# Altium PCB Review_2510_RegulationChauffage_Motherboard.PcbDoc (part 1 of 2)
Units mm, origin at the board's own origin, x right, y up, seen from the top; angles counter-clockwise.
Board outline 110.26 x 190.25 mm, 2 copper layers (Top Layer, Bottom Layer), stack 1.586 mm thick; 113 components, 95 nets, 627 pads, 337 vias.
Unrouted connection lines stored in the file: 154.
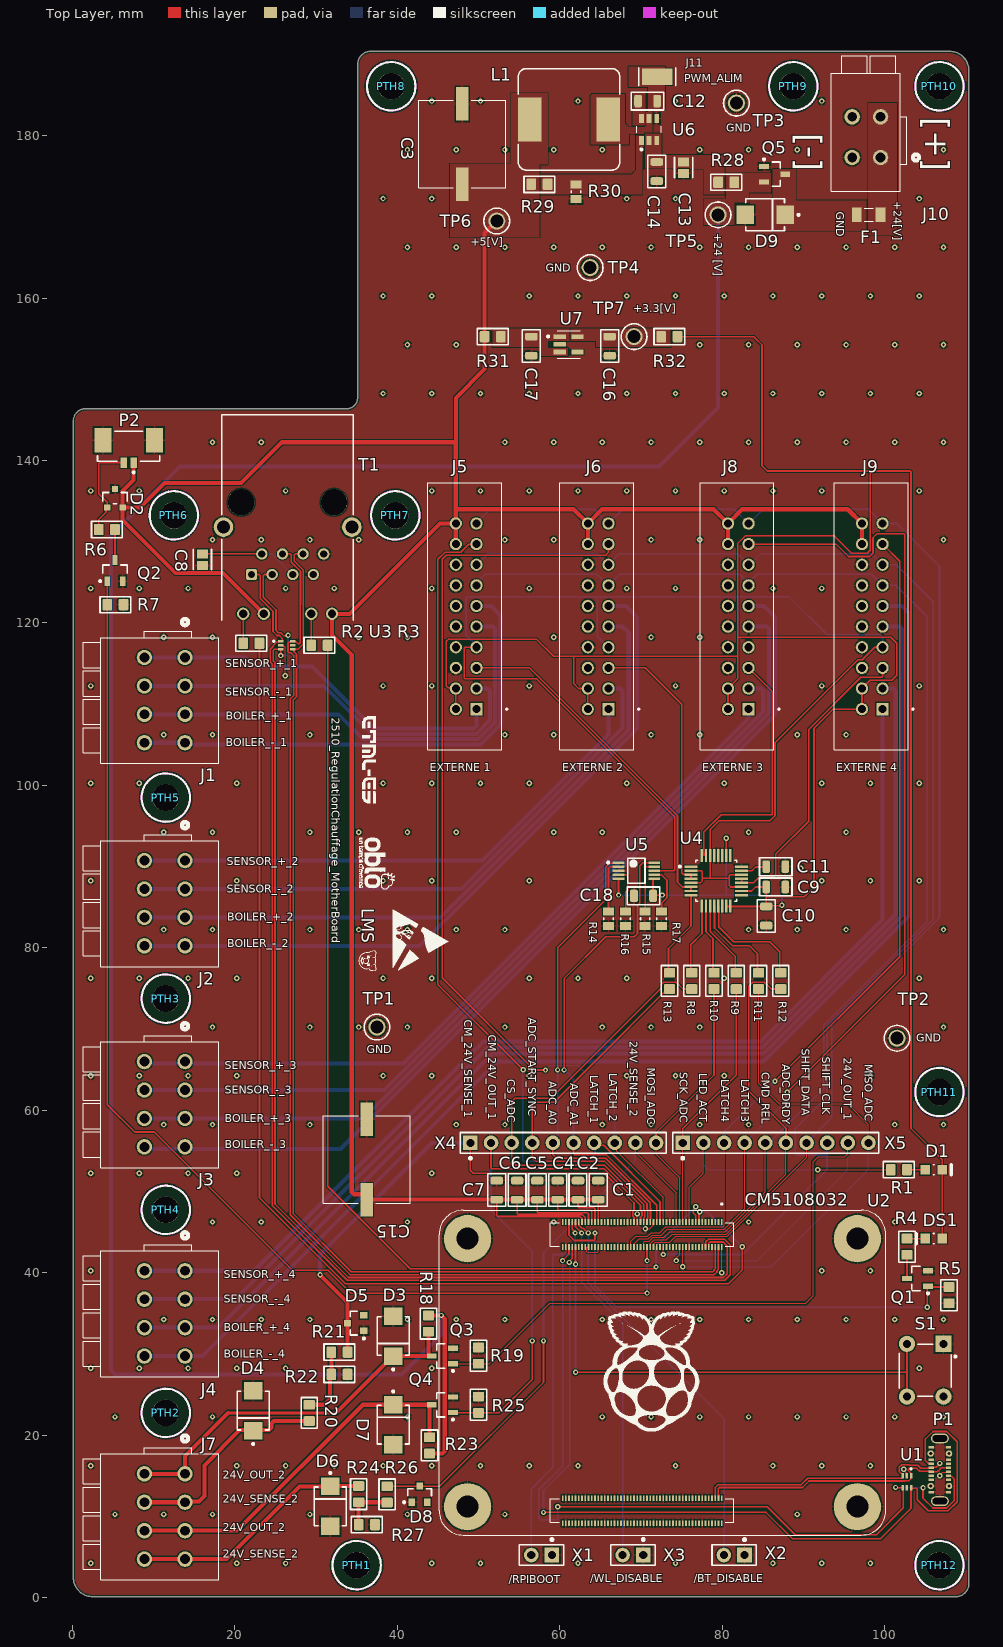
[diagram p0: Top Layer view]
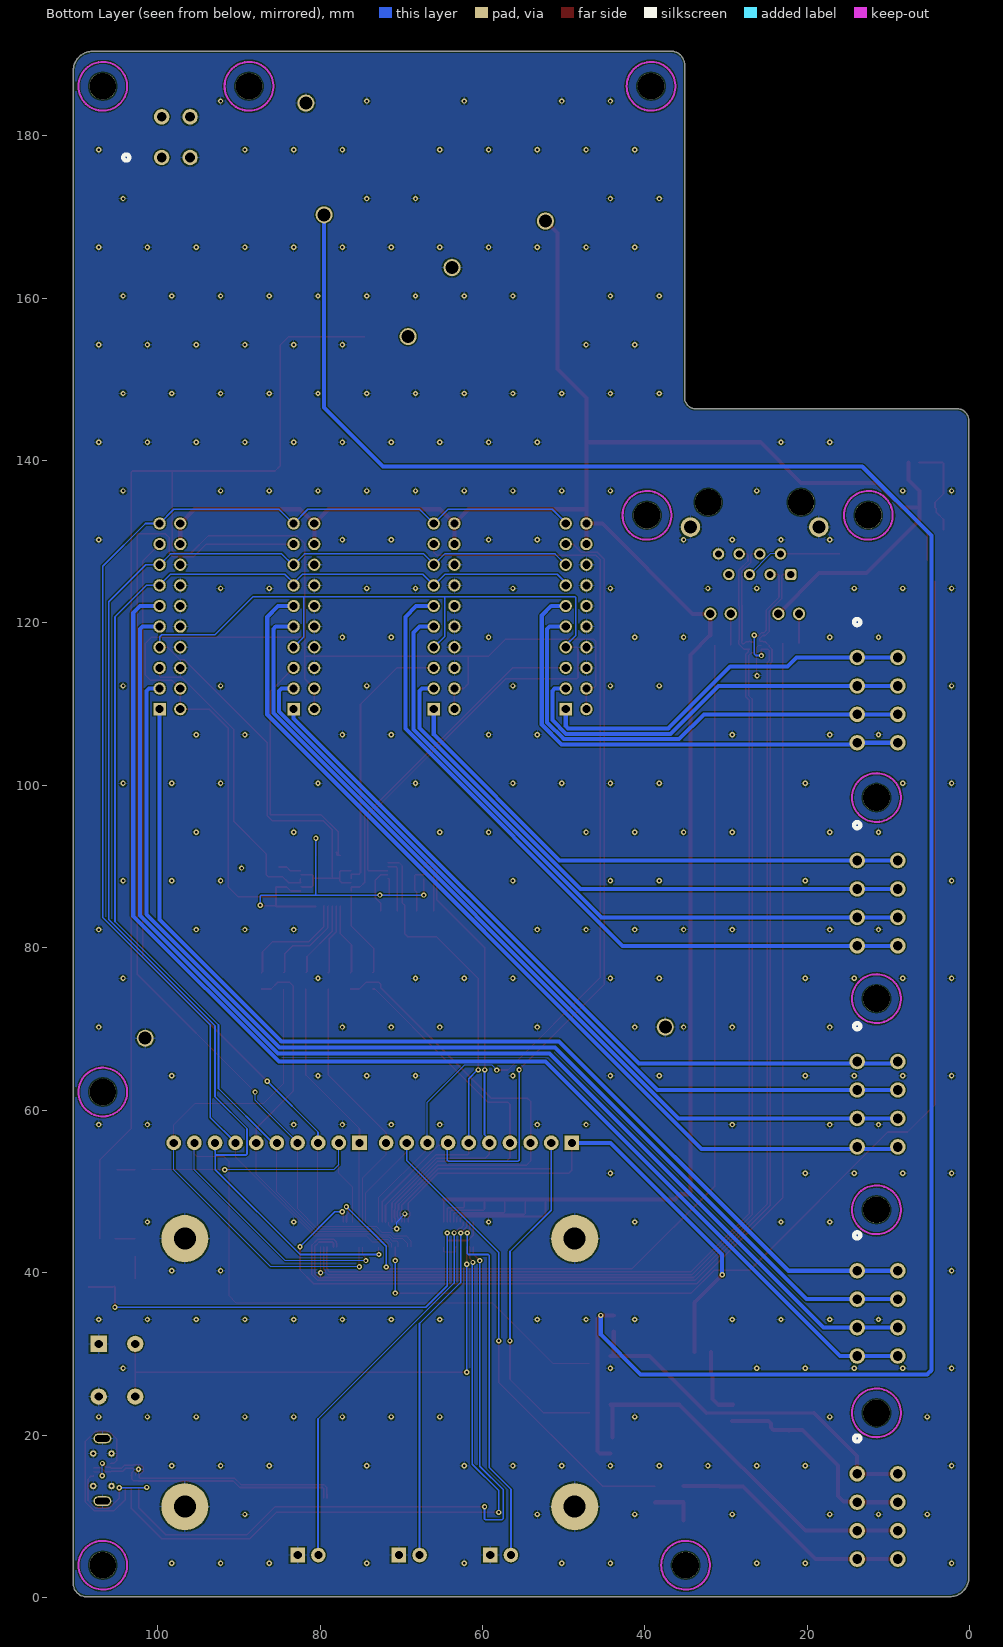
[diagram p1: Bottom Layer view, seen from below]

## Layer stack, top to bottom
Top Solder: solder mask 0.0102, Solder Resist, Dk 3.5
Top Layer: signal copper 0.018
Dielectric1: core 1.55, FR-4, Dk 4.8
Bottom Layer: signal copper 0.018
Bottom Solder: solder mask 0.0102, Solder Resist, Dk 3.5

## Board outline
0.123,2.5 0.123,144.744 cw(c1.625,144.875) 0.123,145.012 cw(c1.625,144.875) 1.488,146.377 1.5,146.377 33.75,146.377 ccw(c33.75,147.75) 35.123,147.75 35.123,188.75 cw(c36.75,188.75) 36.75,190.377 108,190.377 cw(c108,188) 110.377,188 110.377,1.75 cw(c108.75,1.75) 108.75,0.123 2.5,0.123 cw(c2.5,2.5)

## Design rules (kind name [scope] priority, off if disabled: settings)
BoardOutlineClearance [All] p1: gap=0.25 ignorepadtopadclearanceinfootprint=FALSE except(0: Arc-SplitContinuation Track-SplitContinuation SMDPad-SplitContinuation THPad-SplitContinuation Via-SplitContinuation Fill-SplitContinuation Poly-SplitContinuation Region-SplitContinuation Text-SplitContinuation)
Clearance Clearance-xPP-xTP-xTT [All] p1: gap=0.151 ignorepadtopadclearanceinfootprint=FALSE
ComponentClearance [All] p1: gap=0.25 collisioncheckmode=3 verticalgap=0.25 showdistances=FALSE
DiffPairsRouting [InDifferentialPairClass('All Differential Pairs')] p1: maxlimit=0.159 minlimit=0.159 mostfreqgap=0.159 toplayer_minwidth=0.2 toplayer_maxwidth=0.2 toplayer_prefwidth=0.2 bottomlayer_minwidth=0.2 bottomlayer_maxwidth=0.2 bottomlayer_prefwidth=0.2 impedanceprofiledriven=TRUE impedanceprofileid={1775DF52-77C0-4347-A6C1-AED06435F6BF} impedanceprofilevalue=100.000000 maxuncoupledlength=12.5
Height [All] p1: minheight=0 maxheight=1000 prefheight=12.5
HoleSize HoleSize-PTH [All] p1: absolutevalues=TRUE maxlimit=10 minlimit=0.25 maxpercent=80.000 minpercent=20.000
HoleToHoleClearance [All] p1: gap=0.35 allowstackedmicrovias=TRUE
MinimumAnnularRing "Minimum IAR  >0.45mm" [((ObjectKind = 'Pad') OR (ObjectKind = 'Via')) And (Layer = 'MultiLayer') And (HoleDiameter > AsMM(0.45))] p1: minimumring=0.175 // minimum inner annular ring for pads > 0.45mm finished hole size
MinimumAnnularRing "Minimum IAR <=0.45mm" [((ObjectKind = 'Pad') OR (ObjectKind = 'Via')) And (Layer = 'MultiLayer') And (HoleDiameter <= AsMM(0.45))] p2: minimumring=0.175 // minimum inner annular ring for pads <= 0.45mm finished hole size
MinimumSolderMaskSliver [All] p1: minsoldermaskwidth=0.08
PasteMaskExpansion [All] p1: expansion=-0.025
PlaneClearance PlaneClearance-IPI [All] p1: clearance=0.25
PlaneConnect [All] p1: planeconnectstyle=Relief reliefexpansion=0.175 reliefentries=4 reliefconductorwidth=0.2 reliefairgap=0.2
PolygonConnect PolygonConnect-xTW [InNet('GND')] p1: connectstyle=Relief reliefconductorwidth=0.2 reliefentries=4 polygonreliefangle="90 Angle" airgapwidth=0.2
PolygonConnect [All] p2: connectstyle=Direct reliefconductorwidth=0.254 reliefentries=4 polygonreliefangle="90 Angle" airgapwidth=0.254
RoutingCorners [All] p1: cornerstyle=45-Degree minsetback=2.5 maxsetback=2.5
RoutingVias RoutingViasES [All] p1: holewidth=0.3 width=0.65 viastyle="Through Hole" minholewidth=0.25 minwidth=0.61 maxholewidth=0.45 maxwidth=0.8 // finishet hole size <= 0.45mm
SilkToSilkClearance [All] p1: silktosilkclearance=0.2
SilkToSolderMaskClearance SilkscreenOverComponentPads [IsPad] p1: minsilkscreentomaskgap=0.2 clearancetoexposedcopper=TRUE
SolderMaskExpansion [All] p1: expansion=0 istentingtop=FALSE
SupplyNets "Schematic Supply Nets_4" [InNet('GND')] p1: voltage=0.000
SupplyNets "Schematic Supply Nets_2" [InNet('+3V3')] p2: voltage=0.000
SupplyNets "Schematic Supply Nets_1" [InNet('+5V')] p3: voltage=0.000
SupplyNets "Schematic Supply Nets" [InNet('+24V')] p4: voltage=0.000
UnRoutedNet [All] p1: checkbadconnections=TRUE
Width Width-xTW [All] p1: maxlimit=1.5 minlimit=0.15 preferedwidth=0.2
17 further rules are at their usual default settings.

## Classes and differential pairs
component class 2510_RegulationChauffage_MotherBoard_TOP: PTH1 PTH2 PTH3 PTH4 PTH5 PTH6 PTH7 PTH8 PTH9 PTH10 PTH11 PTH12
component class Designator: C9 C10 C11 C18 D3 D4 D5 D6 D7 D8 J1 J2 J3 J4 J5 J6 J7 J8 J9 Q3 Q4 R8 R9 R10 R11 R12 R13 R14 R15 R16 R17 R18 R19 R20 R21 R22 R23 R24 R25 R26 R27 U4 U5
differential pair USB: +USB_P -USB_N
differential pair ETH_TD: +ETH_TD_P -ETH_TD_N
differential pair ETH_RD: +ETH_RD_P -ETH_RD_N

## Components (designator, comment, footprint, x,y, rotation, side; value= is the part's Value field where it differs from the comment)
C1 "100nF" CAPC2012X08M 64.75,50.175 r90 top
C2 "100nF" CAPC2012X08M 62.25,50.175 r90 top
C3 "47 uF" CAP_EDH_9P_KEM 48,178.953 r270 top
C4 "100nF" CAPC2012X08M 59.75,50.175 r90 top
C5 "100nF" CAPC2012X08M 57.25,50.175 r90 top
C6 "100nF" CAPC2012X08M 54.75,50.175 r90 top
C7 "100nF" CAPC2012X08M 52.25,50.175 r90 top
C8 "0.1 uF" FP-CC0805-0_85-IPC_C 16,127.799 r270 top
C9 "100nF" CAPC2012X08M 86.596,87.499 r0 top
C10 "100nF" CAPC2012X08M 85.421,83.924 r270 top
C11 "1uF" CAPC2012X08M 86.596,89.999 r180 top
C12 "100nF" CAPC2012X08M 70.825,184.25 r180 top
C13 "4.7uF" FP-CC0805-0_85-IPC_C 75.25,176.049 r270 top
C14 "100nF" CAPC2012X08M 71.95,175.575 r90 top
C15 "EEEFT1H470AP" CAP_EDH_9P_KEM 36.25,53.953 r270 top
C16 "1uF" CAPC2012X08M 66.15,154.075 r90 top
C17 "1uF" CAPC2012X08M 56.5,154.075 r90 top
C18 "100nF" CAPC2012X08M 70.316,86.399 r180 top
D1 "LTST-C170KGKT" LTST-C170KRKT_V 106.05,52.695 r0 top
D2 "SP0502BAHTG" FP-SP0502BAH-MFG 5.25,135.355 r90 top
D3 "SMBJ28A" FP-SMBJ-MFG 39.5,32.2 r90 top
D4 "SMBJ28A" FP-SMBJ-MFG 22.25,23.025 r90 top
D5 "BZX84C3V6LT1G" ONSC-SOT-23-3-318-08_V 34.88,33.8 r180 top
D6 "SMBJ28A" FP-SMBJ-MFG 31.75,11.25 r270 top
D7 "SMBJ28A" FP-SMBJ-MFG 39.5,21.3 r270 top
D8 "BZX84C3V6LT1G" ONSC-SOT-23-3-318-08_V 42.75,12.75 r90 top
D9 "SMBJ28A" FP-SMBJ-MFG 85.3,170.25 r180 top
DS1 "LTST-C170KRKT" LTST-C170KRKT_V 106.05,44.21 r180 top
F1 "ERB-RG1R25V" FUSC3216X75N 98.035,170.25 r180 top
J1 "2601-1104" CONN4_2601-1104_WAG 13.87,115.75 r270 top
J2 "2601-1104" CONN4_2601-1104_WAG 13.87,90.75 r270 top
J3 "2601-1104" CONN4_2601-1104_WAG 13.87,66 r270 top
J4 "2601-1104" CONN4_2601-1104_WAG 13.87,40.25 r270 top
J5 "SBH11-PBPC-D10-ST-BK" SULLINS_SBH11-PBPC-D10-ST-BK 48.48,120.82 r90 top locked
J6 "SBH11-PBPC-D10-ST-BK" SULLINS_SBH11-PBPC-D10-ST-BK 64.73,120.82 r90 top locked
J7 "2601-1104" CONN4_2601-1104_WAG 13.87,15.25 r270 top
J8 "SBH11-PBPC-D10-ST-BK" SULLINS_SBH11-PBPC-D10-ST-BK 81.98,120.82 r90 top locked
J9 "SBH11-PBPC-D10-ST-BK" SULLINS_SBH11-PBPC-D10-ST-BK 98.48,120.82 r90 top locked
J10 "2601-1102" CONN2_2601-1102_WAG 99.5,177.306 r180 top
J11 "5019" FP-5019-MFG 72,187.25 r0 top
L1 "10uH" BOUR-SRR1280-2_V 61.15,182 r180 top
P1 "629712010214" 629712010214 106.8,15.75 r90 top
P2 "53398-0271" MOLX-53398-0271_V 6.925,141.125 r180 top
PTH1 "Mounting Hole M3" "M3 MOUNTING HOLE" 35,4 r0 top
PTH2 "Mounting Hole M3" "M3 MOUNTING HOLE" 11.5,22.75 r0 top
PTH3 "Mounting Hole M3" "M3 MOUNTING HOLE" 11.5,73.75 r0 top
PTH4 "Mounting Hole M3" "M3 MOUNTING HOLE" 11.5,47.75 r0 top
PTH5 "Mounting Hole M3" "M3 MOUNTING HOLE" 11.5,98.5 r0 top
PTH6 "Mounting Hole M3" "M3 MOUNTING HOLE" 12.5,133.25 r0 top
PTH7 "Mounting Hole M3" "M3 MOUNTING HOLE" 39.75,133.25 r0 top
PTH8 "Mounting Hole M3" "M3 MOUNTING HOLE" 39.25,186.072 r0 top
PTH9 "Mounting Hole M3" "M3 MOUNTING HOLE" 88.75,186.072 r0 top
PTH10 "Mounting Hole M3" "M3 MOUNTING HOLE" 106.75,186.072 r0 top
PTH11 "Mounting Hole M3" "M3 MOUNTING HOLE" 106.75,62.25 r0 top
PTH12 "Mounting Hole M3" "M3 MOUNTING HOLE" 106.75,4 r0 top
Q1 "IRLML2402" SOT95P237X112-3M 104.05,39.295 r180 top
Q2 "IRLML2402" SOT95P237X112-3M 5.25,126.44 r90 top
Q3 "IRLML6344" SOT95P237X112-3M 45.55,29.75 r180 top
Q4 "IRLML6344" SOT95P237X112-3M 45.55,23.75 r180 top
Q5 "BSS308P" SOT95P237X112-3M 86.45,175.25 r0 top
R1 "560R" RESC2012X06M 101.75,52.695 r0 top
R2 "1k5" RESC2012X06M 22.035,117.5 r0 top
R3 "1k5" RESC2012X06M 30.425,117.25 r0 top
R4 "680R" RESC2012X06M 102.75,43.21 r90 top
R5 "10k" RESC2012X06M 107.925,37.245 r90 top
R6 "100R" RESC2012X06M 4.25,131.5 r180 top
R7 "10k" RESC2012X06M 5.3,122.25 r180 top
R8 "47R" RESC2012X06M 76.261,75.931 r270 top
R9 "47R" RESC2012X06M 81.739,75.931 r270 top
R10 "47R" RESC2012X06M 79,75.931 r270 top
R11 "47R" RESC2012X06M 84.478,75.931 r270 top
R12 "47R" RESC2012X06M 87.217,75.931 r270 top
R13 "47R" RESC2012X06M 73.522,75.931 r270 top
R14 "2k2 1%" RESC2012X06N 65.998,83.599 r90 top
R15 "2k7 1%" RESC2012X06N 70.515,83.599 r90 top
R16 "10k 1%" RESC2012X06N 68.111,83.599 r90 top
R17 "100k 1%" RESC2012X06N 72.526,83.599 r90 top
R18 "10k" RESC2012X06M 43.841,33.75 r90 top
R19 "10k" RESC2012X06M 50,29.8 r270 top
R20 "120k" RESC2012X06M 29.165,22.75 r270 top
R21 "1k0" RESC2012X06M 32.88,30.225 r0 top
R22 "18k" RESC2012X06M 32.88,27.488 r180 top
R23 "10k" RESC2012X06M 43.975,18.75 r270 top
R24 "120k" RESC2012X06M 35.25,12.75 r90 top
R25 "10k" RESC2012X06M 50,23.75 r270 top
R26 "1k0" RESC2012X06M 38.75,12.707 r90 top
R27 "18k" RESC2012X06M 36.25,9 r180 top
R28 "0R" RESC2012X06M 80.5,174.25 r180 top
R29 "100k" RESC2012X06M 57.5,174 r0 top
R30 "19k1" RESC2012X06N 62,173.1 r90 top
R31 "0R" RESC2012X06M 51.75,155.25 r0 top
R32 "0R" RESC2012X06M 73.5,155.25 r0 top
S1 "1P1T-P" TE_1-1825910-4 105,28 r270 top
T1 "74990101212" 74990101212 26.5,133 r180 top
TP1 "5011" KSTN-5011_V 37.5,70.25 r90 top
TP2 "5011" KSTN-5011_V 101.525,68.875 r90 top
TP3 "5011" KSTN-5011_V 81.75,184 r90 top
TP4 "5011" KSTN-5011_V 63.75,163.75 r90 top
TP5 "5010" KSTN-5010_V 79.5,170.25 r180 top
TP6 "5010" KSTN-5010_V 52.25,169.482 r90 top
TP7 "5010" KSTN-5010_V 69.154,155.25 r90 top
U1 "TPD4E1U06DCKR" SOT50P160X60-6N 102.75,14.265 r270 top
U2 "CM5108032" MODULE_CM5108032 72.65,27.71 r0 top locked
U3 "TPD4E1U06DCKR" SOT50P160X60-6N 26.4,117.25 r0 top
U4 "ADS124S08IPBSR" FP-PBS0032A-MFG 79.261,88.249 r0 top
U5 "TMUX1204DGSR" FP-DGS0010A-MFG 69.444,89.499 r0 top
U6 "LMR51625XFDDCR" DDC0006A-MFG 71,180.75 r90 top
U7 "TPS7A2033PDBVR" DBV0005A-IPC_B 61.1,154.3 r0 top
X1 "2.54" PIN-1x02-2.54 59.04,5.25 r180 top
X2 "2.54" PIN-1x02-2.54 82.75,5.25 r180 top
X3 "2.54" PIN-1x02-2.54 70.29,5.25 r180 top
X4 "2.54" PIN-1X10-2.54 49,56 r0 top
X5 "2.54" PIN-1X10-2.54 75.15,56 r0 top

## Footprints (in the part's own frame and the unit in brackets; to place one, negate y for a bottom-side part, rotate by r counter-clockwise, add the part's x,y. Pads: shape width x height; smd on the part's side, far side on the other; paste and mask are expansions set on the pad)
74990101212 [mm] "LAN Transformer, body 25.3x16.2mm"
  rrect50% 1.4x1.4 hole 0.9: 1(4.445,7.04)
  round 1.4 hole 0.9: 2(3.175,4.5) 3(1.905,7.04) 4(0.635,4.5) 5(-0.635,7.04) 6(-1.905,4.5) 7(-3.175,7.04) 8(-4.445,4.5)
  round 1.52 hole 1.02: 9(5.465,11.87) 10(2.925,11.87) 11(-2.925,11.87) 12(-5.465,11.87)
  round 3.25 hole 3.25 unplated: MH1(-5.715,-1.85) MH2(5.715,-1.85)
  round 2.4 hole 1.6: Shell(-7.9,1.2) Shell(7.9,1.2)
  silkscreen extent -8.1,-12.65 8.1,12.65, body extent -8.2,-12.65 8.2,12.65, height 13.61
629712010214 [mm] "USB TYPE C VERTICAL PLUG"
  rect 0.3x0.65 smd: A1(2.75,1.05) A4(1.25,1.05) A5(0.75,1.05) A6(0.25,1.05) A7(-0.25,1.05) A8(-0.75,1.05) A9(-1.25,1.05) A12(-2.75,1.05) B1(-2.75,-1.05) B4(-1.25,-1.05) B5(-0.75,-1.05) B6(-0.25,-1.05) B7(0.25,-1.05) B8(0.75,-1.05) B9(1.25,-1.05) B12(2.75,-1.05)
  oval 1.2x2.2 hole 0.8 slot 1.8 at 90 deg: Shell(-3.86,0) Shell(3.86,0)
  round 0.8 hole 0.4: Shell(-2,-1.125) Shell(-2,1.125) Shell(2,-1.125) Shell(2,1.125)
  body extent -4.13,-1.8 4.12,1.8, height 6.8
BOUR-SRR1280-2_V [mm] "SMD, 2-Leads, Body 12.5x12.5mm"
  rect 2.9x5.4 smd: 1(-4.85,0) 2(4.85,0)
  silkscreen extent -6.25,-6.25 6.25,6.25, body extent -6.25,-6.25 6.25,6.25, height 7.51
CAP_EDH_9P_KEM [mil]
  rect 162x59 smd paste+0 mask+0: 1(-195,0) 2(195,0)
  silkscreen extent -212,-212 212,212, body extent -256,-206 256,206, height 415
CAPC2012X08M [mm] "Chip Capacitor, 2-Leads, Body 2.00x1.25mm, IPC Low Density"
  rrect50% 0.95x1.55 smd: 1(-1.175,0) 2(1.175,0)
  silkscreen extent -2,-1.1 2,1.1, body extent -1.1,-0.72 1.1,0.72, height 0.85
CONN2_2601-1102_WAG [mm]
  round 1.9 / inner round 1.524 / far side round 1.9 hole 1.2 paste-2539.97 mask+0: 1(0,0) 2(0,-5) 3(3.5,0) 4(3.5,-5)
  silkscreen extent -4.74,-12.52 6.05,4.15, body extent -3.05,-12.23 6.2,4.35, height 12.75
CONN4_2601-1104_WAG [mm]
  round 1.9 / inner round 1.524 / far side round 1.9 hole 1.2 paste-2539.97 mask+0: 1(0,0) 2(0,-5) 3(3.5,0) 4(3.5,-5) 5(7,0) 6(7,-5) 7(10.5,0) 8(10.5,-5)
  silkscreen extent -4.74,-12.52 13.05,4.15, body extent -3.17,-12.39 13.08,4.19, height 12.75
DBV0005A-IPC_B [mm]
  rect 1.505x0.572 smd paste+0 mask+0: 1(-1.1,0.95) 2(-1.1,0) 3(-1.1,-0.95) 4(1.1,-0.95) 5(1.1,0.95)
  silkscreen extent -2.65,-1.7 1.4,1.7, body extent -1.4,-1.45 1.4,1.45, height 1.2
DDC0006A-MFG [mm]
  rect 1.1x0.6 smd paste+0 mask+0: 1(-1.35,0.95) 2(-1.35,0) 3(-1.35,-0.95) 4(1.35,-0.95) 5(1.35,0) 6(1.35,0.95)
  silkscreen extent -2.57,-1.53 0.42,1.53, body extent -1.44,-1.45 1.44,1.45, height 0.95
FP-5019-MFG [mm]
  rect 3.8x2.03 smd paste+0 mask+0: 1(0,0)
  silkscreen extent -2.27,-1.08 2.27,1.08
FP-CC0805-0_85-IPC_C [mm]
  rect 1.105x1.356 smd paste+0 mask+0: 1(-0.701,0) 2(0.701,0)
  silkscreen extent -1.25,-1.12 1.25,1.12, body extent -1.35,-0.82 1.35,0.82, height 0.25
FP-DGS0010A-MFG [mm]
  rrect33% 1.45x0.3 smd paste+0 mask+0: 1(-2.2,1) 2(-2.2,0.5) 3(-2.2,0) 4(-2.2,-0.5) 5(-2.2,-1) 6(2.2,-1) 7(2.2,-0.5) 8(2.2,0) 9(2.2,0.5) 10(2.2,1)
  silkscreen extent -3.6,-1.55 1.05,1.55, body extent -3.03,-1.8 3.03,1.8, height 0.25
FP-PBS0032A-MFG [mm]
  rect 1.6x0.3 smd paste-1000 mask+0: 1(-3.1,1.75) 2(-3.1,1.25) 3(-3.1,0.75) 4(-3.1,0.25) 5(-3.1,-0.25) 6(-3.1,-0.75) 7(-3.1,-1.25) 8(-3.1,-1.75) 17(3.1,-1.75) 18(3.1,-1.25) 19(3.1,-0.75) 20(3.1,-0.25) 21(3.1,0.25) 22(3.1,0.75) 23(3.1,1.25) 24(3.1,1.75)
  rect 0.3x1.6 smd paste-1000 mask+0: 9(-1.75,-3.1) 10(-1.25,-3.1) 11(-0.75,-3.1) 12(-0.25,-3.1) 13(0.25,-3.1) 14(0.75,-3.1) 15(1.25,-3.1) 16(1.75,-3.1) 25(1.75,3.1) 26(1.25,3.1) 27(0.75,3.1) 28(0.25,3.1) 29(-0.25,3.1) 30(-0.75,3.1) 31(-1.25,3.1) 32(-1.75,3.1)
  silkscreen extent -4.6,-2.52 2.52,2.52, body extent -4,-4 4,4, height 0.25
FP-SMBJ-MFG [mm]
  rect 2.16x2.26 smd paste+0 mask+0: 1(-2.45,0) 2(2.45,0)
  silkscreen extent -4.22,-1.97 2.37,1.97, body extent -3.63,-2.07 3.63,2.07, height 0.25
FP-SP0502BAH-MFG [mm]
  rect 0.78x0.78 smd paste+0 mask+0: 1(-1.145,0.95) 2(-1.145,-0.95) 3(1.145,0)
  silkscreen extent -0.7,-1.52 0.7,1.52, body extent -1.64,-1.62 1.64,1.62, height 0.25
FUSC3216X75N [mm]
  rect 1.19x1.77 smd: 1(-1.465,0) 2(1.465,0)
  silkscreen extent -0.55,-0.8 0.55,0.8, body extent -1.6,-0.8 1.6,0.8, height 0.75
KSTN-5010_V [mm] "Test Point, Dia 3.17mm"
  round 2.1 hole 1.6: 1(0,0)
  silkscreen extent -1.59,-1.58 1.59,1.58, body extent -1.59,-1.59 1.59,1.59, height 8.13
KSTN-5011_V [mm] "Test Point, Dia 3.17mm"
  round 2.1 hole 1.6: 1(0,0)
  silkscreen extent -1.58,-1.59 1.58,1.59, body extent -1.59,-1.59 1.59,1.59, height 8.13
LTST-C170KRKT_V [mm] "SMD, 2-Leads, Body 2x1.25mm"
  rect 1.2x1.2 smd: 1(-1.05,0) 2(1.05,0)
  silkscreen extent -0.05,-0.64 2.16,0.64, body extent -1,-0.63 1,0.63, height 1.2
"M3 MOUNTING HOLE" [mm]
  round 3.3 hole 3.3 unplated: 1(0,0)
  Keep-Out Layer circle w0.254: c0,0 r3
  silkscreen extent -2.97,-2.97 2.98,2.97, body extent -2.86,-2.69 2.86,2.69, height 1.7
MODULE_CM5108032 [mm]
  rect 0.2x0.7 smd: 1(7.3,18.54) 2(7.3,15.46) 3(6.9,18.54) 4(6.9,15.46) 5(6.5,18.54) 6(6.5,15.46) 7(6.1,18.54) 8(6.1,15.46) 9(5.7,18.54) 10(5.7,15.46) 11(5.3,18.54) 12(5.3,15.46) 13(4.9,18.54) 14(4.9,15.46) 15(4.5,18.54) 16(4.5,15.46) 17(4.1,18.54) 18(4.1,15.46) 19(3.7,18.54) 20(3.7,15.46) 21(3.3,18.54) 22(3.3,15.46) 23(2.9,18.54) 24(2.9,15.46) 25(2.5,18.54) 26(2.5,15.46) 27(2.1,18.54) 28(2.1,15.46) 29(1.7,18.54) 30(1.7,15.46) 31(1.3,18.54) 32(1.3,15.46) 33(0.9,18.54) 34(0.9,15.46) 35(0.5,18.54) 36(0.5,15.46) 37(0.1,18.54) 38(0.1,15.46) 39(-0.3,18.54) 40(-0.3,15.46) 41(-0.7,18.54) 42(-0.7,15.46) 43(-1.1,18.54) 44(-1.1,15.46) 45(-1.5,18.54) 46(-1.5,15.46) 47(-1.9,18.54) 48(-1.9,15.46) 49(-2.3,18.54) 50(-2.3,15.46) 51(-2.7,18.54) 52(-2.7,15.46) 53(-3.1,18.54) 54(-3.1,15.46) 55(-3.5,18.54) 56(-3.5,15.46) 57(-3.9,18.54) 58(-3.9,15.46) 59(-4.3,18.54) 60(-4.3,15.46) 61(-4.7,18.54) 62(-4.7,15.46) 63(-5.1,18.54) 64(-5.1,15.46) 65(-5.5,18.54) 66(-5.5,15.46) 67(-5.9,18.54) 68(-5.9,15.46) 69(-6.3,18.54) 70(-6.3,15.46) 71(-6.7,18.54) 72(-6.7,15.46) 73(-7.1,18.54) 74(-7.1,15.46) 75(-7.5,18.54) 76(-7.5,15.46) 77(-7.9,18.54) 78(-7.9,15.46) 79(-8.3,18.54) 80(-8.3,15.46) 81(-8.7,18.54) 82(-8.7,15.46) 83(-9.1,18.54) 84(-9.1,15.46) 85(-9.5,18.54) 86(-9.5,15.46) 87(-9.9,18.54) 88(-9.9,15.46) 89(-10.3,18.54) 90(-10.3,15.46) 91(-10.7,18.54) 92(-10.7,15.46) 93(-11.1,18.54) 94(-11.1,15.46) 95(-11.5,18.54) 96(-11.5,15.46) 97(-11.9,18.54) 98(-11.9,15.46) 99(-12.3,18.54) 100(-12.3,15.46) 101(7.3,-15.46) 102(7.3,-18.54) 103(6.9,-15.46) 104(6.9,-18.54) 105(6.5,-15.46) 106(6.5,-18.54) 107(6.1,-15.46) 108(6.1,-18.54) 109(5.7,-15.46) 110(5.7,-18.54) 111(5.3,-15.46) 112(5.3,-18.54) 113(4.9,-15.46) 114(4.9,-18.54) 115(4.5,-15.46) 116(4.5,-18.54) 117(4.1,-15.46) 118(4.1,-18.54) 119(3.7,-15.46) 120(3.7,-18.54) 121(3.3,-15.46) 122(3.3,-18.54) 123(2.9,-15.46) 124(2.9,-18.54) 125(2.5,-15.46) 126(2.5,-18.54) 127(2.1,-15.46) 128(2.1,-18.54) 129(1.7,-15.46) 130(1.7,-18.54) 131(1.3,-15.46) 132(1.3,-18.54) 133(0.9,-15.46) 134(0.9,-18.54) 135(0.5,-15.46) 136(0.5,-18.54) 137(0.1,-15.46) 138(0.1,-18.54) 139(-0.3,-15.46) 140(-0.3,-18.54) 141(-0.7,-15.46) 142(-0.7,-18.54) 143(-1.1,-15.46) 144(-1.1,-18.54) 145(-1.5,-15.46) 146(-1.5,-18.54) 147(-1.9,-15.46) 148(-1.9,-18.54) 149(-2.3,-15.46) 150(-2.3,-18.54) 151(-2.7,-15.46) 152(-2.7,-18.54) 153(-3.1,-15.46) 154(-3.1,-18.54) 155(-3.5,-15.46) 156(-3.5,-18.54) 157(-3.9,-15.46) 158(-3.9,-18.54) 159(-4.3,-15.46) 160(-4.3,-18.54) 161(-4.7,-15.46) 162(-4.7,-18.54) 163(-5.1,-15.46) 164(-5.1,-18.54) 165(-5.5,-15.46) 166(-5.5,-18.54) 167(-5.9,-15.46) 168(-5.9,-18.54) 169(-6.3,-15.46) 170(-6.3,-18.54) 171(-6.7,-15.46) 172(-6.7,-18.54) 173(-7.1,-15.46) 174(-7.1,-18.54) 175(-7.5,-15.46) 176(-7.5,-18.54) 177(-7.9,-15.46) 178(-7.9,-18.54) 179(-8.3,-15.46) 180(-8.3,-18.54) 181(-8.7,-15.46) 182(-8.7,-18.54) 183(-9.1,-15.46) 184(-9.1,-18.54) 185(-9.5,-15.46) 186(-9.5,-18.54) 187(-9.9,-15.46) 188(-9.9,-18.54) 189(-10.3,-15.46) 190(-10.3,-18.54) 191(-10.7,-15.46) 192(-10.7,-18.54) 193(-11.1,-15.46) 194(-11.1,-18.54) 195(-11.5,-15.46) 196(-11.5,-18.54) 197(-11.9,-15.46) 198(-11.9,-18.54) 199(-12.3,-15.46) 200(-12.3,-18.54)
  round 5.8 hole 2.7: SH1(-24,16.5) SH2(24,16.5) SH3(-24,-16.5) SH4(24,-16.5)
  silkscreen extent -27.5,-20 27.5,20.85, body extent -27.3,-19.94 27.7,20.06, height 7.51
MOLX-53398-0271_V [mm] "Header, 2-Leads, Body 7.65x3.7mm, Pitch 1.25mm"
  rect 0.8x1.3 smd: 1(-0.625,1.375) 2(0.625,1.375)
  rect 2.1x3 smd: MP1(-3.175,-1.375) MP2(3.175,-1.375)
  silkscreen extent -3.82,-2.47 3.83,2.7, body extent -3.82,-2.49 3.83,1.71, height 4.72
ONSC-SOT-23-3-318-08_V [mm] "SOT23, 3-Leads, Body 2.92x1.3mm, Pitch 0.95mm"
  rect 0.9x0.8 smd: 1(-1,0.95) 2(-1,-0.95) 3(1,0)
  silkscreen extent -1.13,-1.46 0.65,2.02, body extent -0.65,-1.46 0.65,1.46, height 1.11
PIN-1x02-2.54 [mm] ".025 SQ Post Terminal Strip Assembly, 1x2 Pins, Vertical, 2.54mm Pitch, Male"
  rect 1.8x1.8 hole 1: 1(0,0)
  round 1.8 hole 1: 2(2.54,0)
  silkscreen extent -1.46,-2.05 4,1.27, body extent -1.27,-1.27 3.81,1.27, height 8.6
PIN-1X10-2.54 [mm] ".025 SQ Post Terminal Strip Assembly, 1x10 Pins, Vertical, 2.54mm Pitch, Male"
  rect 1.8x1.8 hole 1: 1(0,0)
  round 1.8 hole 1: 2(2.54,0) 3(5.08,0) 4(7.62,0) 5(10.16,0) 6(12.7,0) 7(15.24,0) 8(17.78,0) 9(20.32,0) 10(22.86,0)
  silkscreen extent -1.25,-2.05 24.13,1.27, body extent -1.27,-1.27 24.13,1.27, height 8.6
RESC2012X06M [mm] "Chip Resistor, 2-Leads, Body 2.00x1.25mm, IPC Low Density"
  rrect25% 1.2x1.4 smd: 1(-1,0) 2(1,0)
  silkscreen extent -1.9,-1 1.9,1, body extent -1.05,-0.63 1.05,0.63, height 0.6
RESC2012X06N [mm] "Chip Resistor, 2-Leads, Body 2.00x1.25mm, IPC Medium Density"
  rect 1x1.35 smd: 1(-0.9,0) 2(0.9,0)
  silkscreen extent -0.1,-0.58 0.1,0.58, body extent -1.05,-0.67 1.05,0.67, height 0.6
SOT50P160X60-6N [mm]
  rect 0.66x0.31 smd: 1(-0.735,0.5) 2(-0.735,0) 3(-0.735,-0.5) 4(0.735,-0.5) 5(0.735,0) 6(0.735,0.5)
  silkscreen extent -1.7,0.4 -1.5,0.6, body extent -0.8,-0.8 0.8,0.8, height 0.6
SOT95P237X112-3M [mm] "SOT23, 3-Leads, Body 2.92x2.37mm, Pitch 0.95mm, IPC Low Density"
  rect 1.2x0.65 smd: 1(-1.3,0.95) 2(-1.3,-0.95) 3(1.3,0)
  silkscreen extent -1.43,-1.5 0.7,1.95, body extent -1.32,-1.52 1.32,1.52, height 1.12
SULLINS_SBH11-PBPC-D10-ST-BK [mm]
  rect 1.508x1.508 / inner round 1.508 / far side rect 1.508x1.508 hole 1 mask+0.05: 1(-11.43,-1.27)
  round 1.508 hole 1 mask+0.05: 2(-11.43,1.27) 3(-8.89,-1.27) 4(-8.89,1.27) 5(-6.35,-1.27) 6(-6.35,1.27) 7(-3.81,-1.27) 8(-3.81,1.27) 9(-1.27,-1.27) 10(-1.27,1.27) 11(1.27,-1.27) 12(1.27,1.27) 13(3.81,-1.27) 14(3.81,1.27) 15(6.35,-1.27) 16(6.35,1.27) 17(8.89,-1.27) 18(8.89,1.27) 19(11.43,-1.27) 20(11.43,1.27)
  silkscreen extent -16.45,-5.1 16.45,4.7, body extent -52.67,-6.63 47.33,8.89, height 66
TE_1-1825910-4 [mm] "Switch Tactile OFF (ON) SPST Round Button PC Pins 0.05A 24VDC 1.57N Thru-Hole Loose Piece"
  rect 2x2 hole 1 paste-2539.97 mask+0: 13(-3.25,2.25)
  round 2 hole 1 paste-2539.97 mask+0: 13(3.25,2.25) 14(-3.25,-2.25) 14(3.25,-2.25)
  silkscreen extent -3.2,-3.2 3.2,3.83, body extent -3.9,-2.99 3.9,3, height 9.6

## Part data
C1 C2 C4 C5 C6 C7 C9 C10 C12 C14 C18: library part CMP-065-000038-2, "CAPC 100nF X7R 50V 10% 2012 (0805 INCH)"
C3 C15: library part "CAP ALUM 47UF 20% 50V SMD", "CAP ALUM 47UF 20% 50V SMD"
C8: library part "CAP CER 0.1 uF", "CAP CER 0.1 uF 10V X5R 0805"
C11 C16 C17: library part CMP-065-000041-2, "CAPC 1uF X5R 25V 10% 2012 (0805 INCH)"
C13: library part "CAP CER 4.7UF", "CAP CER 4.7UF 10V X5R 0805"
D1: "Ultra Bright AlInGaP Chip LED, 75 mW, -55 to 85 degC, 2-Pin SMD (0805), RoHS, Tape and Reel"
D2: "TVS DIODE 5.5V 8.5V SOT23-3"
D3 D4 D6 D7 D9: library part CMP-08607-000081-1, "TVS DIODE 28V 45.4V DO214AA"
D5 D8: library part CMP-1060-01139-1, "Zener Voltage Regulator, 225 mW, 3-Pin SOT-23, Pb-Free, Tape and Reel"
DS1: "LED Red, 75 mW, 54 mcd, -55 to 85 degC, 2-Pin SMD, RoHS, Tape and Reel"
F1: "Micro Chip Fuse, Size [LÃ—W] (EIA) (mm): 3.2Ã—1.6 (EIA:1206), Rated Current (A): 1.25, Internal R [at 25â„ƒ max.] (mâ„"
J1 J2 J3 J4 J7 J10: "Description"
J5 J6 J8 J9: "Connector Header Through Hole 20 position 0.100 (2.54mm)"
L1: library part "IND 10uH", "Semi-Shielded Power Inductor, 10 uH, +/- 20%, 2.1 A, -40 to 125 degC, 2-Pin SMD, RoHS, Tape and Reel SRN3015-100M"
P1: "USB 2.0 Type C Plug Vertical SMT"
P2: library part CMP-2000-07600-1, "Male Header, Pitch 1.25 mm, 1 x 2 Position, Height 4.7 mm, -40 to 85 degC, RoHS, Tape and Reel"
Q3 Q4: library part IRLML6344TRPBF, "MOSFET N-CH 30V 5A MICRO3/SOT23"
Q5: library part BSS308PEH6327XTSA1, "Canal P 30 V 2 A (Ta) 500mW (Ta) Montage en surface PG-SOT23"
R1: library part CMP-066-000184-2, "RES 560ohm  ±1% 0.125W 2012 (0805 INCH)"
R2 R3: library part CMP-066-000189-2, "RES 1.5kohm  ±1% 0.125W 2012 (0805 INCH)"
R4: library part CMP-066-000185-2, "RES 680ohm  ±1% 0.125W 2012 (0805 INCH)"
R5 R7 R18 R19 R23 R25: library part CMP-066-000199-2, "RES 10kohm  ±1% 0.125W 2012 (0805 INCH)"
R6: library part CMP-066-000175-2, "RES 100ohm  ±1% 0.125W 2012 (0805 INCH)"
R8 R9 R10 R11 R12 R13: library part CMP-066-000171-2, "RES 47ohm  ±1% 0.125W 2012 (0805 INCH)"
R14: library part "RES 2.2K OHM 1% 1/8W 0805", "RES 2.2K OHM 1% 1/8W 0805 RC0805FR-072K2L"
R15: library part "RES 2.7K OHM 1% 1/8W 0805_1", "RES 2.7K OHM 1% 1/8W 0805 RC0805FR-102K7L"
R16: library part "RES 10K OHM 1% 1/8W 0805_1", "RES SMD 10K OHM 0.1% 1/8W 0805 AC0805FR-0710KL"
R17: library part "RES 100K OHM 1% 1/8W 0805_1_1", "RES 100K OHM 1% 1/8W 0805 AC0805FR-13100KL"
R20 R24: library part CMP-066-000212-2, "RES 120kohm  ±1% 0.125W 2012 (0805 INCH)"
R21 R26: library part CMP-066-000187-2, "RES 1.0kohm  ±1% 0.125W 2012 (0805 INCH)"
R22 R27: library part CMP-066-000202-2, "RES 18kohm  ±1% 0.125W 2012 (0805 INCH)"
R28 R31 R32: library part CMP-066-000150-2, "RES 0ohm  ±1% 0.125W 2012 (0805 INCH)"
R29: library part CMP-066-000211-2, "RES 100kohm  ±1% 0.125W 2012 (0805 INCH)"
R30: library part "Res 19k1 ±5% 0.25W, 1/4W_1_1", "RES 19k1 OHM 5% 1/4W 0805"
S1: library part CMP-058-000006-2, "SW 600X600X700 24V 50mA THT"
T1: "74990101212 Telecom and Datacom Connector, 8 Contact(s), Female, Right Angle, Solder Terminal, Locking"
TP1 TP2 TP3 TP4: "Test Point, Black, Through Hole, RoHS, Bulk"
TP5 TP6 TP7: "Test Point, Red, Through Hole, RoHS, Bulk"
U1 U3: "Quad 0.8-pF, 5.5-V, Â±15-kV ESD protection diode in SOT-23 & SC70 packages 6-SC70 -40 to 125"
U4: "IC ADC 24BIT SIGMA-DELTA 32LQFP"
U5: library part CMP-04892-000013-1, "MULTIPLEXER"
U6: "Abaisseur de tension Régulateur à découpage IC Positif Réglable 0,8V 1 Sortie 2,5A SOT-23-6 mince, TSOT-23-6"
U7: library part TPS7A2024PDBVR, "300mA ultra-low-noise low-IQ low-dropout (LDO) linear regulator with high PSRR 5-SOT-23 -40 to 125"
X1 X2 X3: library part CMP-054-000008-1, "JUMPER 2.54 1x02"
X4 X5: library part CMP-055-000013-1, "PIN HEADER 2.54 1x10"

## Via types
v1: diameter 0.65, hole 0.3, Top Layer to Bottom Layer, tented top, 337 vias

## Nets (pads, with @x,y where several pads share a name; then routed paths per layer and width w, separated by ;. In a path a pad name is that pad's centre, name@x,y a point inside that pad or via, vN(x,y) a via of type N, cw(c..) or ccw(c..) an arc to the next point about the centre after c; other vN are vias at no path point)
24V_OUT_1: D3.1 J7.1 J7.2 Q3.3 R18.1 | length 45.7
  Top Layer w0.4: 19.175,22.75 32.45,22.75
  Top Layer w0.5: J7.2@8.25,15.25 J7.1@13.25,15.25 ; J7.1@13.87,15.25 13.87,17.445 19.175,22.75 ; 32.45,22.75 39.45,29.75 D3.1@39.5,29.75 Q3.3@43.9,29.75 ; R18.1@43.841,32.75 43.841,29.884 43.975,29.75 Q3.3@44.25,29.75
24V_OUT_2: D7.1 J7.5 J7.6 Q4.3 R23.1 | length 46.7
  Top Layer w0.5: J7.6@8.25,8.25 13.25,8.25 20.25,8.25 35.75,23.75 D7.1@39.5,23.75 Q4.3@44.25,23.75 44.05,23.75 43.975,23.675 R23.1@43.975,19.75
+3V3: C9.1 C10.1 C18.1 D1.2 DS1.1 J5.2 J5.4 J6.2 J6.4 J8.2 J8.4 J9.2 J9.4 R32.2 U4.15 U4.16 U4.18 U4.26 U5.5 U5.6 | length 355.4
  Top Layer w0.2: J5.2@47.21,109.39 J5.4@47.21,111.93 47.116,112.024 46.273,112.024 46.047,112.25 46.047,117.75 46.312,118.015 57.126,118.015 59.25,115.891 61.75,115.891 ; J6.2@63.46,109.39 J6.4@63.46,111.93 62.32,111.93 61.75,112.5 61.75,115.891 ; v1(67.244,86.499) U5.5@67.244,88.499 ; U5.6@71.644,88.499 71.541,88.499 71.491,88.449 C18.1@71.491,86.399 71.591,86.499 v1(72.626,86.499) ; R32.2@74.5,155.25 83.883,155.25 84,155.133 84,155.125 84.906,154.219 84.906,139.344 85.543,138.707 98.215,138.707 ; U4.15@80.511,85.149 80.561,85.099 C10.1@85.421,85.099 C10.1@85.421,85.249 ; U4.26@80.511,91.349 v1(80.511,93.499) ; J8.2@80.71,109.39 J8.4@80.71,111.93 81.897,113.117 81.897,115.891 ; U4.18@82.361,86.999 83.611,86.999 84.111,87.499 C9.1@85.421,87.499 85.421,86.299 ; v1(87.361,85.249) 87.286,85.174 85.496,85.174 C10.1@85.421,85.249 ; 88.037,86.299 90.106,86.299 91.3,87.492 91.3,107.05 93.64,109.39 J9.2@97.21,109.39 J9.4@97.21,111.93 98.215,112.935 100.871,112.935 101.5,113.564 101.5,117.5 100.75,118.25 81.897,118.25 ; 88.037,86.299 85.421,86.299 ; DS1.1@107.1,44.199 D1.2@107.1,52.695 107.1,53.9 103.25,57.75 103.25,138.59 103.133,138.707 98.215,138.707 ; 61.75,115.891 81.897,115.891 ; 81.897,115.891 81.897,118.25 ; 81.897,118.25 81.897,129.778 82.834,130.715 93.785,130.715 95.911,128.589 97.861,128.589 98.215,128.943 98.215,138.707 ; C10.1@85.421,85.249 85.421,86.299
  Bottom Layer w0.2: v1(67.244,86.499) v1(72.626,86.499) 80.511,86.499 ; v1(80.511,93.499) 80.511,86.499 ; v1(87.361,85.249) 87.361,86.382 87.244,86.499 80.511,86.499
+5V: C1.1 C2.1 C3.2 C4.1 C5.1 C6.1 C7.1 C15.2 D2.2 J5.18 J5.20 J6.18 J6.20 J8.18 J8.20 J9.18 J9.20 L1.2 P2.1 R29.1 R31.1 T1.10 T1.12 TP6.1 U2.77 U2.79 U2.81 U2.83 U2.85 U2.87 | length 347.1
  Top Layer w0.2: C7.1@52.25,49 52.25,47.04 52.367,46.923 62.482,46.923 62.701,46.704 62.701,46.694 62.75,46.645 U2.87@62.75,46.25 ; C6.1@54.75,49 54.75,47.289 54.867,47.172 62.783,47.172 63.15,46.806 U2.85@63.15,46.25 ; C5.1@57.25,49 57.25,47.519 57.367,47.402 63.433,47.402 63.55,47.285 U2.83@63.55,46.25 ; C4.1@59.75,49 59.75,47.814 59.867,47.697 63.833,47.697 63.95,47.58 U2.81@63.95,46.25 ; C2.1@62.25,49 62.25,48.117 62.367,48 64.233,48 64.35,47.883 U2.79@64.35,46.25 ; U2.77@64.75,46.25 C1.1@64.75,49
  Top Layer w0.5: P2.1@7.55,139.75 7.55,137.6 6.2,136.25 D2.2@6.2,134.21 ; T1.10@23.575,121.13 18.56,126.145 12.704,126.145 6.2,132.649 D2.2@6.2,134.21 ; J5.20@47.162,132.25 45.25,132.25 34.13,121.13 T1.12@31.965,121.13 31.965,118.489 34.4,116.054 34.4,49.959 34.693,49.666 35.751,49.666 36.25,49.166 C15.2@36.25,49 C7.1@52.25,49 C6.1@54.75,49 C5.1@57.25,49 C4.1@59.75,49 C2.1@62.25,49 C1.1@64.75,49 ; J5.18@47.197,129.723 J5.20@47.197,132.237 ; J5.20@47.197,132.263 47.197,134.009 ; 47.197,142.25 47.197,134.009 ; TP6.1@52.25,169.482 50.75,167.982 R31.1@50.75,155.25 50.75,151.25 47.21,147.71 47.21,142.25 25.785,142.25 20.785,137.25 11.363,137.25 8.323,134.21 D2.2@6.2,134.21 ; J6.18@63.46,129.71 J6.20@63.46,132.25 ; J8.18@80.71,129.71 J8.20@80.71,132.25 ; J9.18@97.21,129.71 J9.20@97.21,132.25 95.46,134 82.46,134 J8.20@80.71,132.25 ; 47.197,134.009 47.205,134 61.71,134 J6.20@63.46,132.25 ; J6.20@63.46,132.25 65.21,134 78.96,134 J8.20@80.71,132.25
+24V: Q5.2 R18.2 R23.2 R28.1 TP5.1 | length 272.9
  Top Layer w0.5: R18.2@43.841,34.75 v1(45.44,34.75) 45.44,34.709 45.849,34.301 45.849,18.043 45.556,17.75 R23.2@44.25,17.75
  Bottom Layer w0.5: v1@45.44,34.433 45.44,32.389 40.552,27.5 5.25,27.5 4.75,28 4.75,130.75 13.25,139.25 72.25,139.25 79.5,146.5 TP5.1@79.5,170.25
ADC_A0: U2.45 U5.1 X4.5 | length 56.7
  Top Layer w0.2: X4.5@59.16,56 59.16,54.59 59.649,54.101 65.653,54.101 71.15,48.604 71.15,47.95 71.179,47.921 71.179,46.572 71.15,46.543 U2.45@71.15,46.25 ; v1(59.735,64.973) 59.735,80.01 65.647,85.922 65.647,89.94 66.108,90.4 66.502,90.4 66.57,90.4 66.669,90.499 U5.1@67.244,90.499
  Bottom Layer w0.2: X4.5@59.16,56 59.16,56.433 59.75,57.023 59.75,64.958 v1(59.735,64.973)
ADC_A1: U2.41 U5.10 X4.6 | length 58.8
  Top Layer w0.2: v1(60.536,64.973) 60.536,76.224 65.667,81.355 69.189,81.355 69.569,81.736 69.569,85.233 69.867,85.531 69.867,87.139 69.861,87.145 69.861,90.089 70.271,90.499 U5.10@71.644,90.499 ; X4.6@61.7,56 61.7,54.639 61.788,54.551 65.699,54.551 71.95,48.3 U2.41@71.95,46.25
  Bottom Layer w0.2: v1(60.536,64.973) 60.632,64.973 61.7,63.905 X4.6@61.7,56
ADC_DRDY: R12.2 U2.46 X5.6 | length 50.2
  Top Layer w0.15: U2.46@71.15,43.17 71.175,43.195 71.175,43.59 71.331,43.746 71.632,44.047 72.268,44.047 73.123,44.047 73.847,44.771 80.518,44.771 87.85,52.103 X5.6@87.85,56
  Top Layer w0.2: R12.2@87.217,74.931 86.045,74.931 85.194,75.782 83.762,75.782 83.288,75.308 83.288,62.371 87.85,57.809 X5.6@87.85,56
ADC_IN+_1: J5.5 U4.6 U4.7 | length 42.8
  Top Layer w0.2: J5.5@49.75,114.47 56.28,114.47 74.5,96.25 74.5,88.092 75.092,87.5 U4.6@76.16,87.5 ; U4.7@76.161,86.999 U4.6@76.161,87.439
ADC_IN+_2: J6.5 U4.3 U4.4 | length 33.4
  Top Layer w0.2: J6.5@66,114.47 70.53,114.47 75.014,109.986 75.014,89.246 75.186,89.074 76.086,89.074 U4.3@76.161,88.999 ; U4.3@76.067,89.033 76.161,88.939 U4.4@76.161,88.499
ADC_IN+_3: J8.5 U4.31 U4.32 | length 32.3
  Top Layer w0.2: U4.32@77.511,91.349 77.57,91.408 77.753,91.408 ; U4.31@78.011,91.778 77.936,91.703 77.936,91.408 77.753,91.408 ; J8.5@83.25,114.47 86.149,111.571 86.149,96.399 79.874,96.399 77.753,94.278 77.753,91.408
ADC_IN+_4: J9.5 U4.20 U4.21 | length 37.6
  Top Layer w0.2: U4.21@82.361,88.499 82.424,88.437 82.424,88.062 U4.20@82.361,87.999 83.861,87.999 84.611,88.749 86.361,88.749 86.611,88.999 86.611,91.561 90.643,95.593 90.643,106.893 97.064,113.314 99.633,113.314 99.75,113.432 J9.5@99.75,114.47
ADC_IN-: J5.7 J6.7 J8.7 J9.7 U4.2 U4.5 U4.19 U4.22 U4.30 U5.8 | length 175.6
  Top Layer w0.2: J5.7@49.75,117.01 48.367,117.01 48.25,116.893 48.25,113.234 48.367,113.117 57.133,113.117 74.149,96.101 74.149,89.61 74.032,89.493 71.65,89.493 U5.8@71.644,89.499 ; U4.5@76.161,87.999 77.339,87.999 77.57,88.23 77.57,88.572 ; U4.2@76.161,89.499 77.453,89.499 77.57,89.382 77.57,88.572 ; U4.19@82.311,87.549 82.261,87.499 81.028,87.499 80.861,87.666 80.861,88.499 ; U4.22@82.361,88.999 80.978,88.999 80.861,88.882 80.861,88.499 ; J9.7@99.75,117.01 98.771,117.01 97.236,115.475 96.725,115.475 86.5,105.25 86.5,96.25 86.496,96.25 85.896,95.65 79.621,95.65 78.511,94.54 U4.30@78.511,91.349 78.511,88.572 ; 77.57,88.572 78.511,88.572 ; 78.511,88.572 80.788,88.572 80.861,88.499
  Bottom Layer w0.2: J5.7@49.75,117.01 49.75,117.25 48.5,118.5 48.5,123.133 48.617,123.25 64.63,123.25 ; J6.7@66,117.01 64.63,118.38 64.63,123.25 ; J8.7@83.25,117.01 82,118.26 82,123.25 ; J9.7@99.75,117.01 99.75,118.293 99.498,118.545 92.928,118.545 88.223,123.25 82,123.25 ; 64.63,123.25 82,123.25
ADC_START_SYNC: R13.2 U2.47 X4.4 | length 48.2
  Top Layer w0.2: U2.47@70.75,46.25 70.75,46.639 70.828,46.717 70.828,47.776 70.75,47.854 70.75,48.507 65.507,53.75 57.026,53.75 56.62,54.156 X4.4@56.62,56 56.62,60.75 56.87,61 59.316,61 64.066,65.75 73.248,74.931 R13.2@73.522,74.931